# EAGLE board sparkfun-atsamd21g-breakout-ProtoPanel_v01 (EAGLE 7.3.0), part 1 of 6
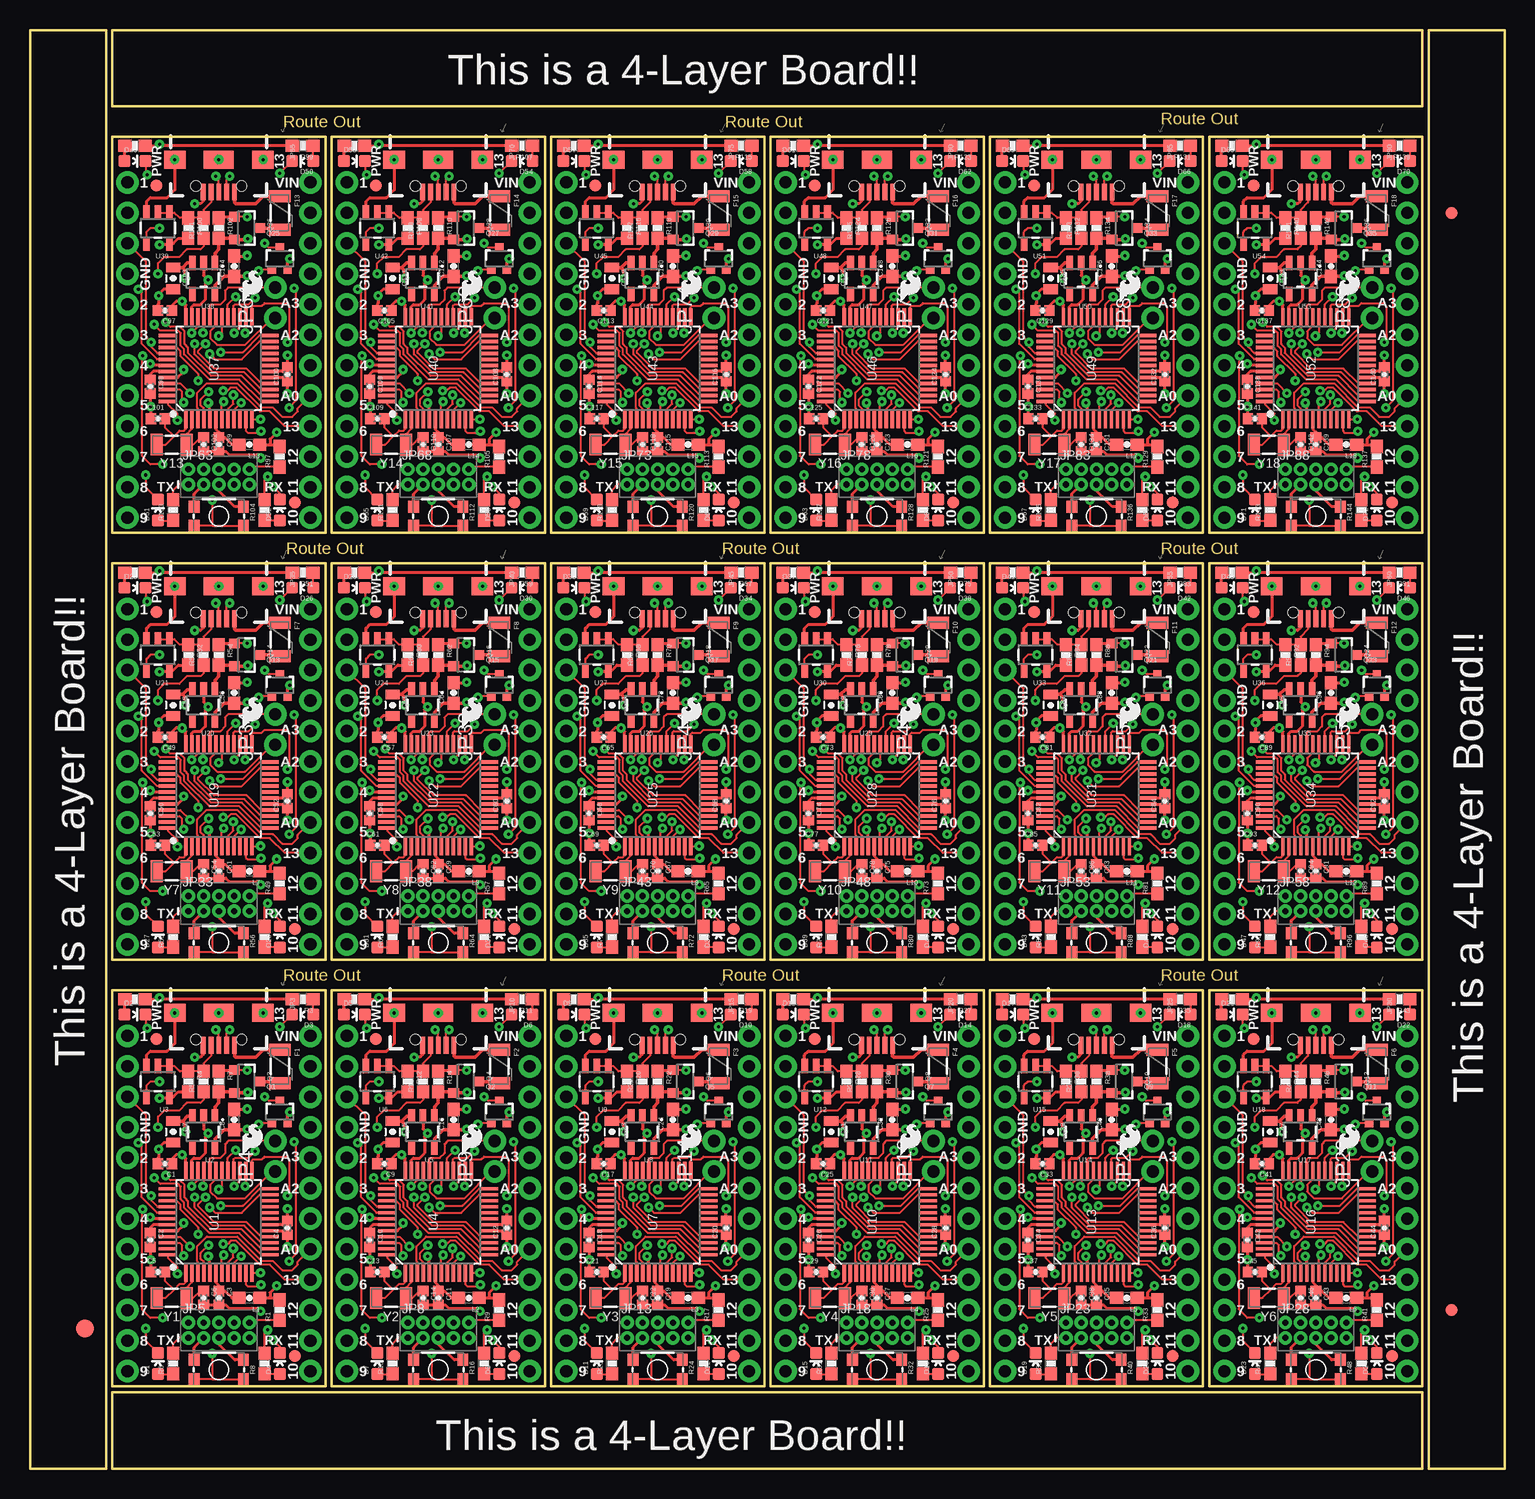
[diagram p0: board, top side]
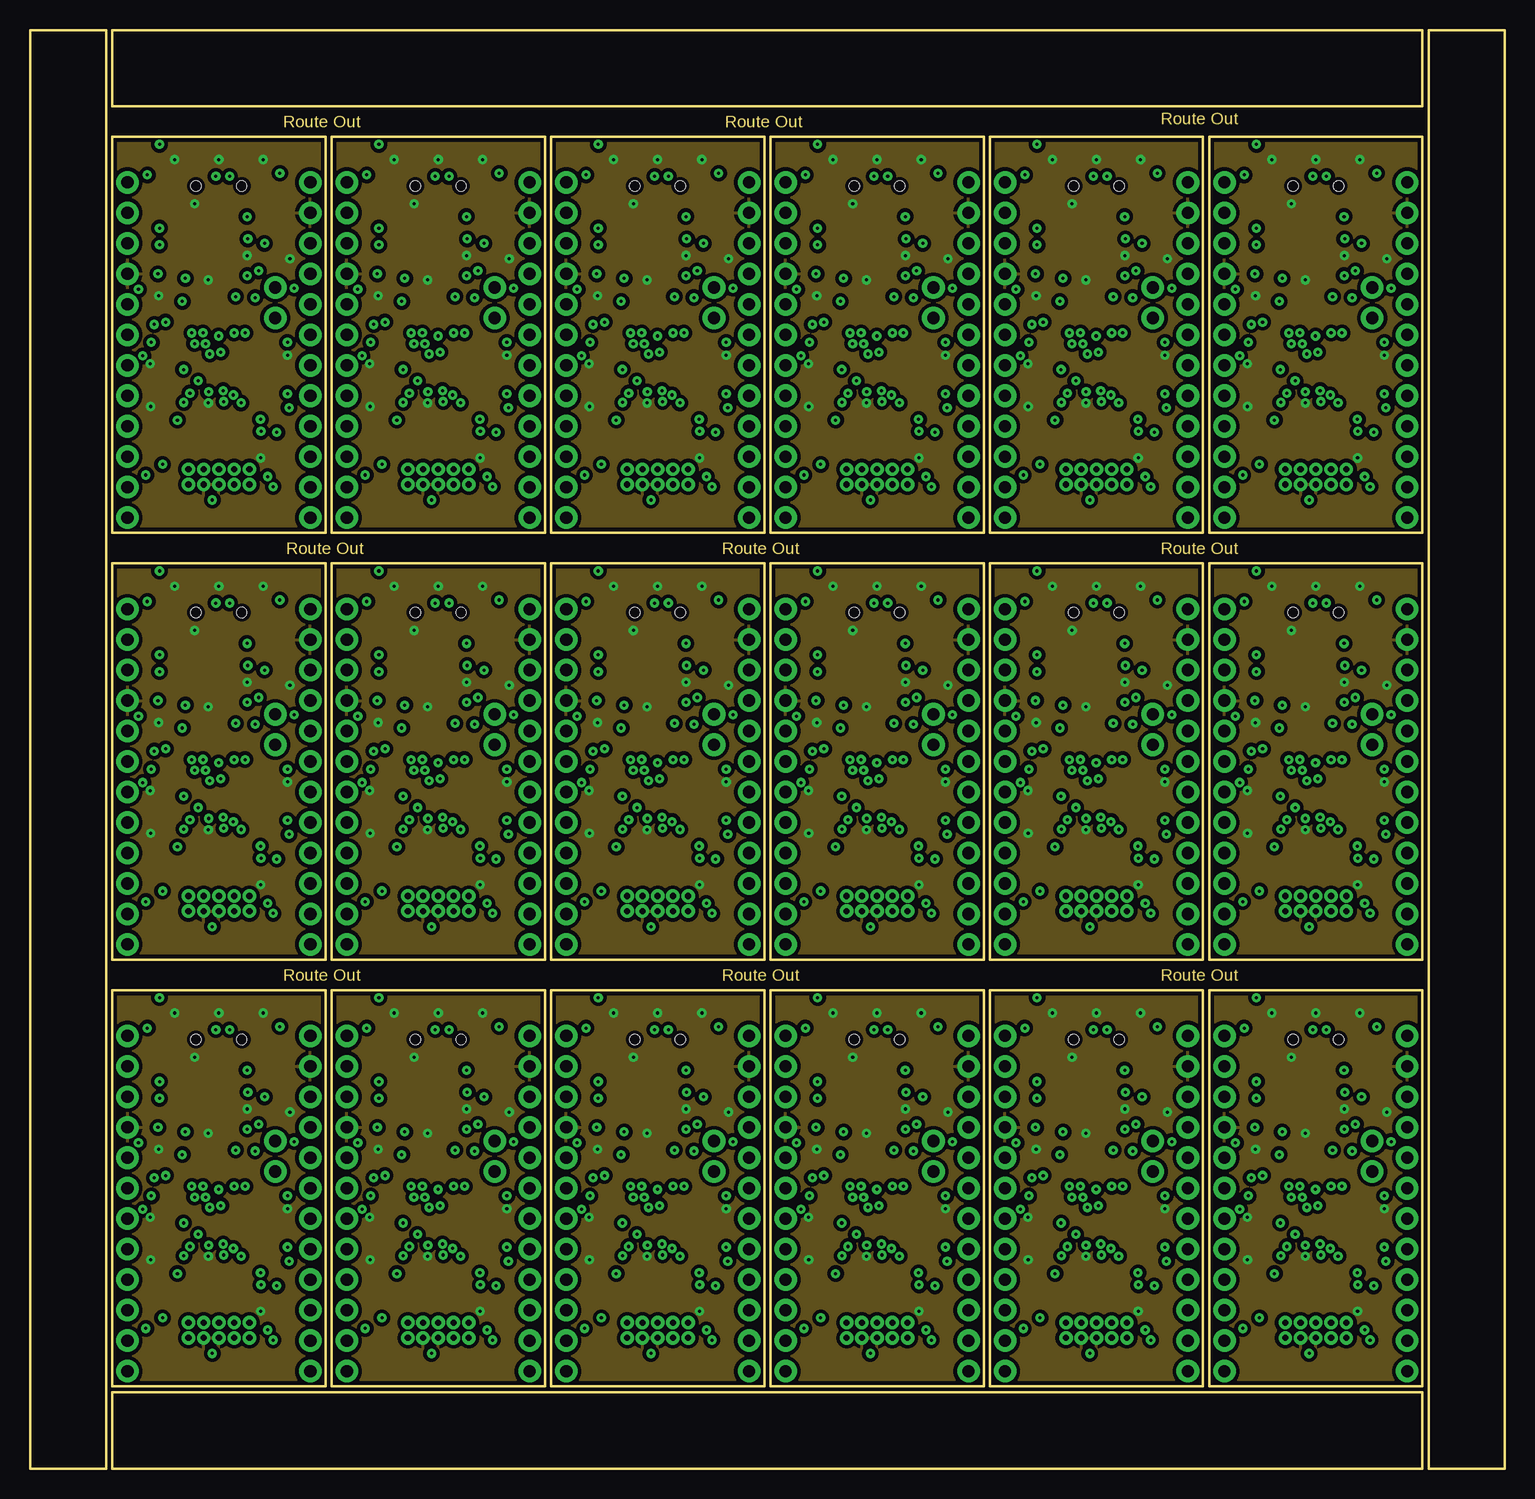
[diagram p1: board, inner layer Route2]
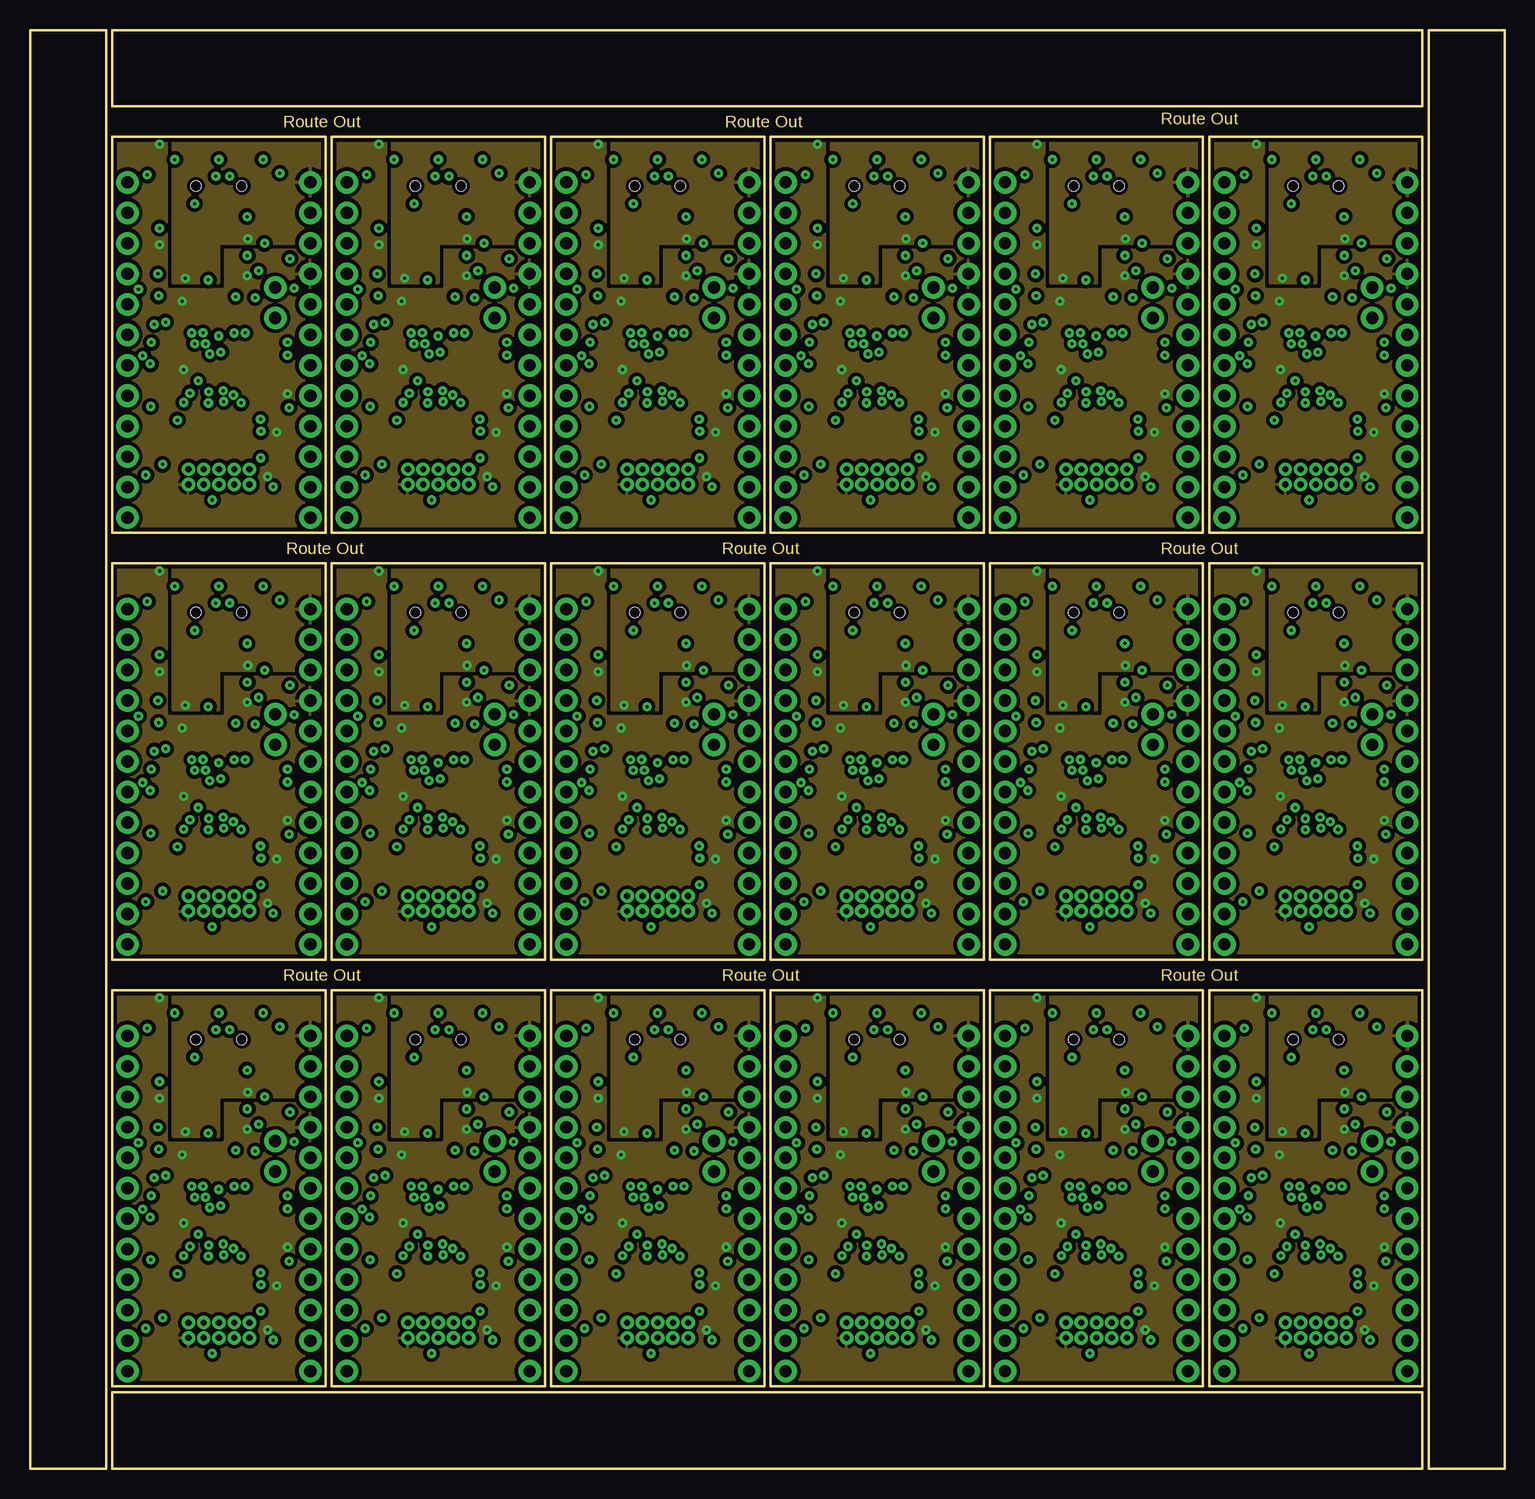
[diagram p2: board, inner layer Route15]
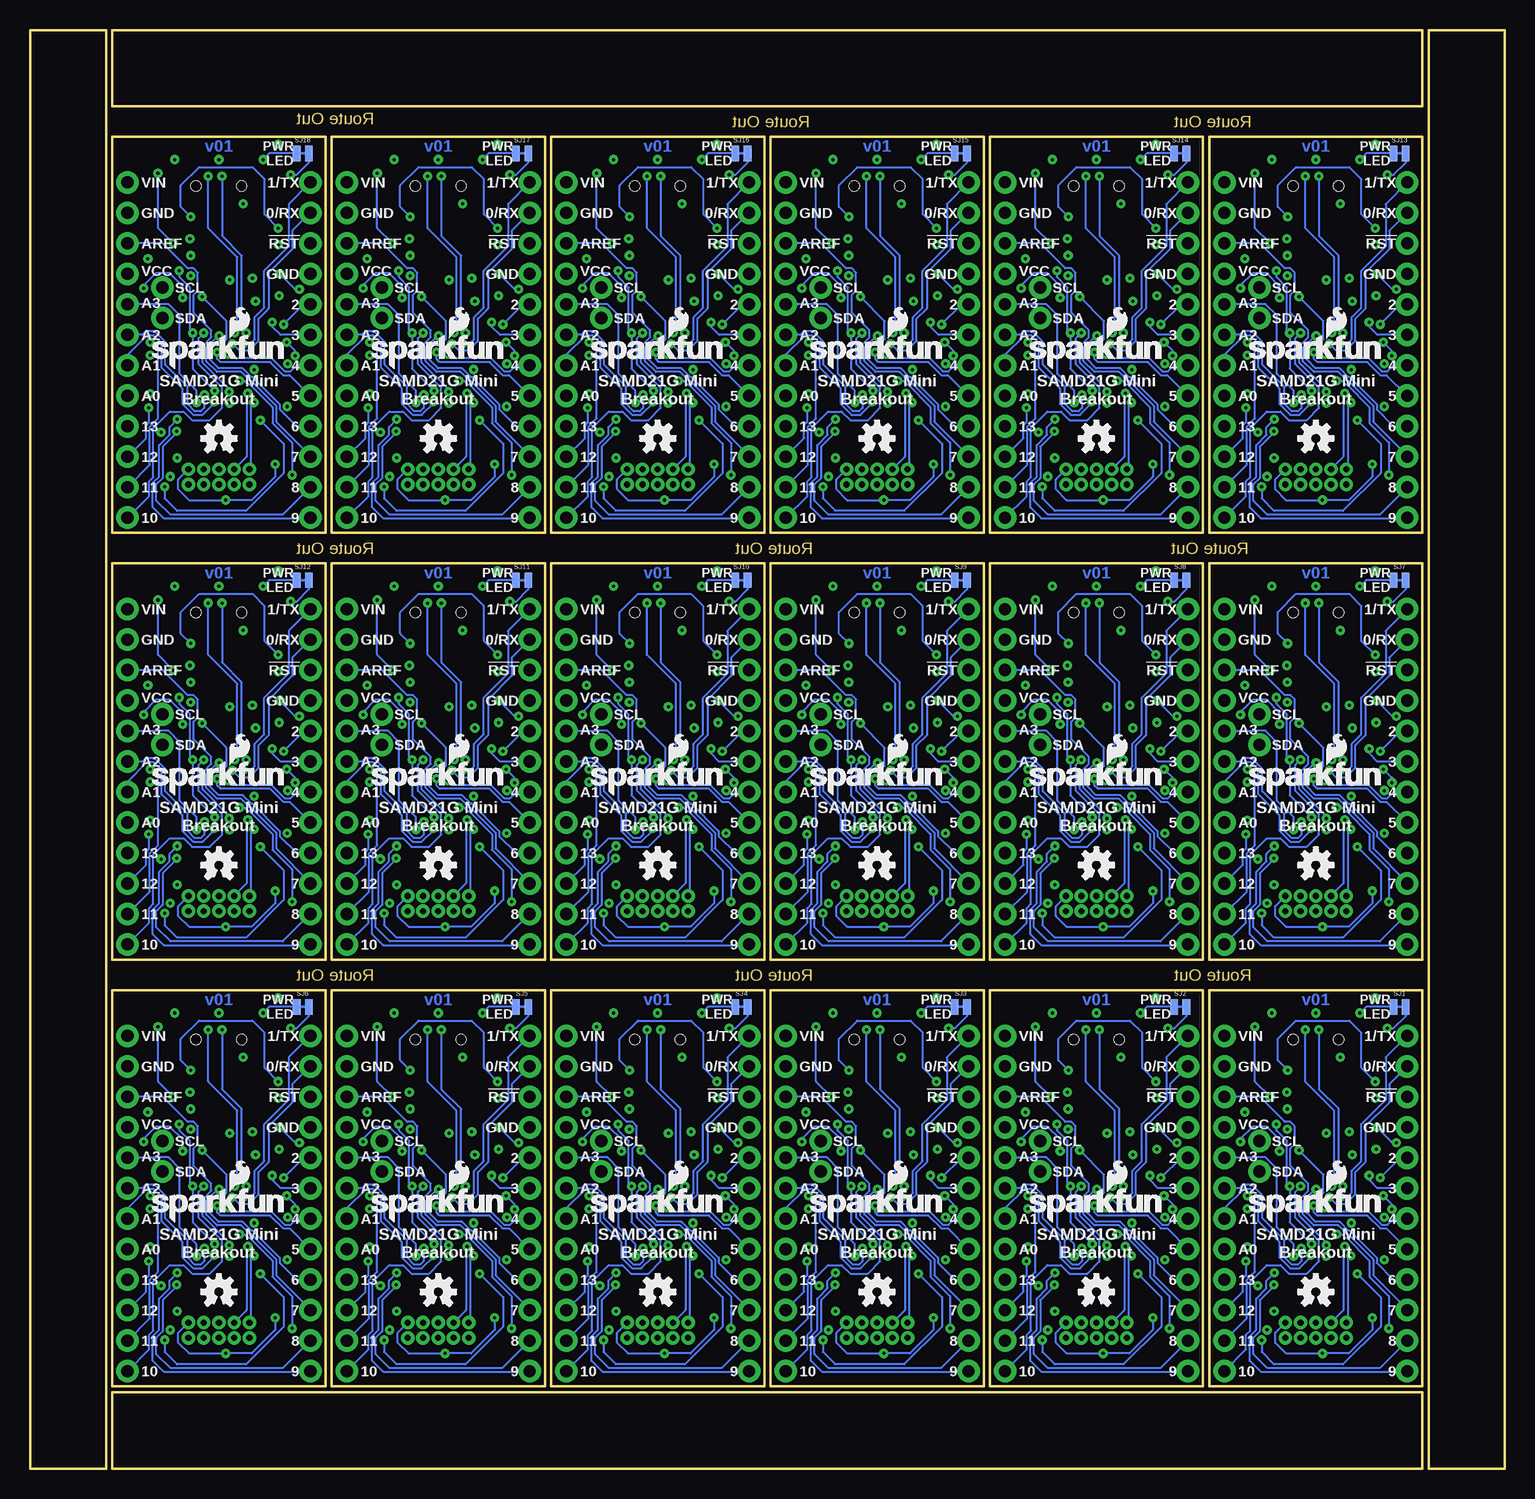
[diagram p3: board, bottom side, seen from below]

Size 122.94 x 119.89 mm. Coordinates in mm from the lower left corner, seen from the top.
Outline: 6.86,6.86 6.86,39.88 24.64,39.88 24.64,6.86 6.86,6.86
Outline: 25.15,6.86 25.15,39.88 42.93,39.88 42.93,6.86 25.15,6.86
Outline: 43.43,6.86 43.43,39.88 61.21,39.88 61.21,6.86 43.43,6.86
Outline: 61.72,6.86 61.72,39.88 79.5,39.88 79.5,6.86 61.72,6.86
Outline: 80.01,6.86 80.01,39.88 97.79,39.88 97.79,6.86 80.01,6.86
Outline: 98.3,6.86 98.3,39.88 116.08,39.88 116.08,6.86 98.3,6.86
Outline: 6.86,42.42 6.86,75.44 24.64,75.44 24.64,42.42 6.86,42.42
Outline: 25.15,42.42 25.15,75.44 42.93,75.44 42.93,42.42 25.15,42.42
Outline: 43.43,42.42 43.43,75.44 61.21,75.44 61.21,42.42 43.43,42.42
Outline: 61.72,42.42 61.72,75.44 79.5,75.44 79.5,42.42 61.72,42.42
Outline: 80.01,42.42 80.01,75.44 97.79,75.44 97.79,42.42 80.01,42.42
Outline: 98.3,42.42 98.3,75.44 116.08,75.44 116.08,42.42 98.3,42.42
Outline: 6.86,77.98 6.86,111 24.64,111 24.64,77.98 6.86,77.98
Outline: 25.15,77.98 25.15,111 42.93,111 42.93,77.98 25.15,77.98
Outline: 43.43,77.98 43.43,111 61.21,111 61.21,77.98 43.43,77.98
Outline: 61.72,77.98 61.72,111 79.5,111 79.5,77.98 61.72,77.98
Outline: 80.01,77.98 80.01,111 97.79,111 97.79,77.98 80.01,77.98
Outline: 98.3,77.98 98.3,111 116.08,111 116.08,77.98 98.3,77.98
Outline: 6.86,113.54 116.08,113.54 116.08,119.89 6.86,119.89 6.86,113.54
Outline: 116.59,119.89 116.59,0 122.94,0 122.94,119.89 116.59,119.89
Outline: 116.08,6.35 6.86,6.35 6.86,0 116.08,0 116.08,6.35
Outline: 6.35,0 6.35,119.89 0,119.89 0,0 6.35,0
Copper layers (1*2*15*16): Top 0.035mm / dielectric 1.5mm / Route2 0.035mm / dielectric 0.15mm / Route15 0.035mm / dielectric 0.2mm / Bottom 0.035mm
Design rules "SparkFun-4-layer *": minimum track width 6mil, minimum drill 10mil, track to track 6mil, track to pad 6mil, pad to pad 6mil, via to via 6mil, smd to smd 6mil, copper to edge 6mil, drill to drill 8mil, minimum pad ring 12mil, minimum via ring 10mil, stop-mask expansion 4mil, vias tented up to drill 20mil, thermal gap 12mil

## Footprints (pad centres in the part's own frame; a part is rotated, then mirrored left to right if it is on the bottom)
0402-CAP = smd 0.85 x 0.9: 1 -0.58,0; 2 0.58,0
0805-CAP = smd 0.8 x 1.2: 1 -0.9,0; 2 0.9,0
0603-CAP = smd 1.1 x 1: 1 -0.85,0; 2 0.85,0
LED-0603 = smd 1 x 1: A 0,-0.877; C 0,0.877
FIDUCIAL-1.5X3 = smd 1.5 x 1.5: 1 0,0
FIDUCIAL-1X2 = smd 1 x 1: 1 0,0
PTC-1206 = smd 1 x 1.8: 1 -1.4,0; 2 1.4,0
1X12_NO_SILK = drill 1.016 pad 1.88: 1 0,0; 2 2.54,0; 3 5.08,0; 4 7.62,0; 5 10.16,0; 6 12.7,0; 7 15.24,0; 8 17.78,0; 9 20.32,0; 10 22.86,0; 11 25.4,0; 12 27.94,0
USB-AB-MICRO-SMD_V03 = smd 1.4 x 0.4: D+1 2.7,0; D-1 2.7,0.65; GND1 2.7,-1.3; ID1 2.7,-0.65; VBUS1 2.7,1.3 | smd 1.5 x 1.8: SHIELD1 0,3.68; SHIELD3 0,-3.68 | smd 1.5 x 2.5: SHIELD2 0,0 | hole 0.85: 2.2,1.9; 2.2,-1.9
1X02_NO_SILK = drill 1.016 pad 1.88: 1 0,0; 2 2.54,0
2X5-PTH-1.27MM = drill 0.508 pad 1: 1 -2.54,-0.635; 2 -2.54,0.635; 3 -1.27,-0.635; 4 -1.27,0.635; 5 0,-0.635; 6 0,0.635; 7 1.27,-0.635; 8 1.27,0.635; 9 2.54,-0.635; 10 2.54,0.635
0603 = smd 1.1 x 1: 1 -0.85,0; 2 0.85,0
SOT323 = smd 0.7 x 0.7: 1 -0.65,-0.925; 2 0.65,-0.925; 3 0,0.925
SOT23-3 = smd 0.8 x 0.9: 1 -0.95,-1; 2 0.95,-1; 3 0,1.1
0603-RES = smd 1.1 x 1: 1 -0.85,0; 2 0.85,0
TACTILE_SWITCH_SMD_4.6X2.8MM = smd 0.9 x 1: 1 -2.05,-0.8; 2 2.05,-0.8; 3 2.05,0.8; 4 -2.05,0.8
PAD-JUMPER-2-NC_BY_TRACE_NO_SILK = smd 0.635 x 1.27: 1 -0.508,0; 2 0.508,0
TQFP-48 = smd 1.5 x 0.28: 1 -4.25,2.75; 2 -4.25,2.25; 3 -4.25,1.75; 4 -4.25,1.25; 5 -4.25,0.75; 6 -4.25,0.25; 7 -4.25,-0.25; 8 -4.25,-0.75; 9 -4.25,-1.25; 10 -4.25,-1.75; 11 -4.25,-2.25; 12 -4.25,-2.75; 25 4.25,-2.75; 26 4.25,-2.25; 27 4.25,-1.75; 28 4.25,-1.25; 29 4.25,-0.75; 30 4.25,-0.25; 31 4.25,0.25; 32 4.25,0.75; 33 4.25,1.25; 34 4.25,1.75; 35 4.25,2.25; 36 4.25,2.75 | smd 0.28 x 1.5: 13 -2.75,-4.25; 14 -2.25,-4.25; 15 -1.75,-4.25; 16 -1.25,-4.25; 17 -0.75,-4.25; 18 -0.25,-4.25; 19 0.25,-4.25; 20 0.75,-4.25; 21 1.25,-4.25; 22 1.75,-4.25; 23 2.25,-4.25; 24 2.75,-4.25; 37 2.75,4.25; 38 2.25,4.25; 39 1.75,4.25; 40 1.25,4.25; 41 0.75,4.25; 42 0.25,4.25; 43 -0.25,4.25; 44 -0.75,4.25; 45 -1.25,4.25; 46 -1.75,4.25; 47 -2.25,4.25; 48 -2.75,4.25
SOT23-5 = smd 0.55 x 1.2: 1 -0.95,-1.3; 2 0,-1.3; 3 0.95,-1.3; 4 0.95,1.3; 5 -0.95,1.3
CRYSTAL-SMD-3.2X1.5MM = smd 1 x 1.8: P$1 -1.25,0; P$2 1.25,0

## Placement (x,y rotation side)
C1  0.1uF  [0402-CAP]  11.25,25.4 180 top
C2  0.1uF  [0402-CAP]  10.03,19.05 270 top
C3  0.1uF  [0402-CAP]  15.75,14.22 270 top
C4  0.1uF  [0402-CAP]  21.46,20.07 90 top
C5  15pF  [0402-CAP]  10.67,16.38 0 top
C6  15pF  [0402-CAP]  14.48,14.22 270 top
C7  1.0uF  [0805-CAP]  11.94,28.07 270 top
C8  2.2uF  [0603-CAP]  17.02,29.08 90 top
C9  0.1uF  [0402-CAP]  29.54,25.4 180 top
C10  0.1uF  [0402-CAP]  28.32,19.05 270 top
C11  0.1uF  [0402-CAP]  34.04,14.22 270 top
C12  0.1uF  [0402-CAP]  39.75,20.07 90 top
C13  15pF  [0402-CAP]  28.96,16.38 0 top
C14  15pF  [0402-CAP]  32.77,14.22 270 top
C15  1.0uF  [0805-CAP]  30.23,28.07 270 top
C16  2.2uF  [0603-CAP]  35.31,29.08 90 top
C17  0.1uF  [0402-CAP]  47.83,25.4 180 top
C18  0.1uF  [0402-CAP]  46.61,19.05 270 top
C19  0.1uF  [0402-CAP]  52.32,14.22 270 top
C20  0.1uF  [0402-CAP]  58.04,20.07 90 top
C21  15pF  [0402-CAP]  47.24,16.38 0 top
C22  15pF  [0402-CAP]  51.05,14.22 270 top
C23  1.0uF  [0805-CAP]  48.51,28.07 270 top
C24  2.2uF  [0603-CAP]  53.59,29.08 90 top
C25  0.1uF  [0402-CAP]  66.12,25.4 180 top
C26  0.1uF  [0402-CAP]  64.9,19.05 270 top
C27  0.1uF  [0402-CAP]  70.61,14.22 270 top
C28  0.1uF  [0402-CAP]  76.33,20.07 90 top
C29  15pF  [0402-CAP]  65.53,16.38 0 top
C30  15pF  [0402-CAP]  69.34,14.22 270 top
C31  1.0uF  [0805-CAP]  66.8,28.07 270 top
C32  2.2uF  [0603-CAP]  71.88,29.08 90 top
C33  0.1uF  [0402-CAP]  84.4,25.4 180 top
C34  0.1uF  [0402-CAP]  83.19,19.05 270 top
C35  0.1uF  [0402-CAP]  88.9,14.22 270 top
C36  0.1uF  [0402-CAP]  94.61,20.07 90 top
C37  15pF  [0402-CAP]  83.82,16.38 0 top
C38  15pF  [0402-CAP]  87.63,14.22 270 top
C39  1.0uF  [0805-CAP]  85.09,28.07 270 top
C40  2.2uF  [0603-CAP]  90.17,29.08 90 top
C41  0.1uF  [0402-CAP]  102.69,25.4 180 top
C42  0.1uF  [0402-CAP]  101.47,19.05 270 top
C43  0.1uF  [0402-CAP]  107.19,14.22 270 top
C44  0.1uF  [0402-CAP]  112.9,20.07 90 top
C45  15pF  [0402-CAP]  102.11,16.38 0 top
C46  15pF  [0402-CAP]  105.92,14.22 270 top
C47  1.0uF  [0805-CAP]  103.38,28.07 270 top
C48  2.2uF  [0603-CAP]  108.46,29.08 90 top
C49  0.1uF  [0402-CAP]  11.25,60.96 180 top
C50  0.1uF  [0402-CAP]  10.03,54.61 270 top
C51  0.1uF  [0402-CAP]  15.75,49.78 270 top
C52  0.1uF  [0402-CAP]  21.46,55.63 90 top
C53  15pF  [0402-CAP]  10.67,51.94 0 top
C54  15pF  [0402-CAP]  14.48,49.78 270 top
C55  1.0uF  [0805-CAP]  11.94,63.63 270 top
C56  2.2uF  [0603-CAP]  17.02,64.64 90 top
C57  0.1uF  [0402-CAP]  29.54,60.96 180 top
C58  0.1uF  [0402-CAP]  28.32,54.61 270 top
C59  0.1uF  [0402-CAP]  34.04,49.78 270 top
C60  0.1uF  [0402-CAP]  39.75,55.63 90 top
C61  15pF  [0402-CAP]  28.96,51.94 0 top
C62  15pF  [0402-CAP]  32.77,49.78 270 top
C63  1.0uF  [0805-CAP]  30.23,63.63 270 top
C64  2.2uF  [0603-CAP]  35.31,64.64 90 top
C65  0.1uF  [0402-CAP]  47.83,60.96 180 top
C66  0.1uF  [0402-CAP]  46.61,54.61 270 top
C67  0.1uF  [0402-CAP]  52.32,49.78 270 top
C68  0.1uF  [0402-CAP]  58.04,55.63 90 top
C69  15pF  [0402-CAP]  47.24,51.94 0 top
C70  15pF  [0402-CAP]  51.05,49.78 270 top
C71  1.0uF  [0805-CAP]  48.51,63.63 270 top
C72  2.2uF  [0603-CAP]  53.59,64.64 90 top
C73  0.1uF  [0402-CAP]  66.12,60.96 180 top
C74  0.1uF  [0402-CAP]  64.9,54.61 270 top
C75  0.1uF  [0402-CAP]  70.61,49.78 270 top
C76  0.1uF  [0402-CAP]  76.33,55.63 90 top
C77  15pF  [0402-CAP]  65.53,51.94 0 top
C78  15pF  [0402-CAP]  69.34,49.78 270 top
C79  1.0uF  [0805-CAP]  66.8,63.63 270 top
C80  2.2uF  [0603-CAP]  71.88,64.64 90 top
C81  0.1uF  [0402-CAP]  84.4,60.96 180 top
C82  0.1uF  [0402-CAP]  83.19,54.61 270 top
C83  0.1uF  [0402-CAP]  88.9,49.78 270 top
C84  0.1uF  [0402-CAP]  94.61,55.63 90 top
C85  15pF  [0402-CAP]  83.82,51.94 0 top
C86  15pF  [0402-CAP]  87.63,49.78 270 top
C87  1.0uF  [0805-CAP]  85.09,63.63 270 top
C88  2.2uF  [0603-CAP]  90.17,64.64 90 top
C89  0.1uF  [0402-CAP]  102.69,60.96 180 top
C90  0.1uF  [0402-CAP]  101.47,54.61 270 top
C91  0.1uF  [0402-CAP]  107.19,49.78 270 top
C92  0.1uF  [0402-CAP]  112.9,55.63 90 top
C93  15pF  [0402-CAP]  102.11,51.94 0 top
C94  15pF  [0402-CAP]  105.92,49.78 270 top
C95  1.0uF  [0805-CAP]  103.38,63.63 270 top
C96  2.2uF  [0603-CAP]  108.46,64.64 90 top
C97  0.1uF  [0402-CAP]  11.25,96.52 180 top
C98  0.1uF  [0402-CAP]  10.03,90.17 270 top
C99  0.1uF  [0402-CAP]  15.75,85.34 270 top
C100  0.1uF  [0402-CAP]  21.46,91.19 90 top
C101  15pF  [0402-CAP]  10.67,87.5 0 top
C102  15pF  [0402-CAP]  14.48,85.34 270 top
C103  1.0uF  [0805-CAP]  11.94,99.19 270 top
C104  2.2uF  [0603-CAP]  17.02,100.2 90 top
C105  0.1uF  [0402-CAP]  29.54,96.52 180 top
C106  0.1uF  [0402-CAP]  28.32,90.17 270 top
C107  0.1uF  [0402-CAP]  34.04,85.34 270 top
C108  0.1uF  [0402-CAP]  39.75,91.19 90 top
C109  15pF  [0402-CAP]  28.96,87.5 0 top
C110  15pF  [0402-CAP]  32.77,85.34 270 top
C111  1.0uF  [0805-CAP]  30.23,99.19 270 top
C112  2.2uF  [0603-CAP]  35.31,100.2 90 top
C113  0.1uF  [0402-CAP]  47.83,96.52 180 top
C114  0.1uF  [0402-CAP]  46.61,90.17 270 top
C115  0.1uF  [0402-CAP]  52.32,85.34 270 top
C116  0.1uF  [0402-CAP]  58.04,91.19 90 top
C117  15pF  [0402-CAP]  47.24,87.5 0 top
C118  15pF  [0402-CAP]  51.05,85.34 270 top
C119  1.0uF  [0805-CAP]  48.51,99.19 270 top
C120  2.2uF  [0603-CAP]  53.59,100.2 90 top
C121  0.1uF  [0402-CAP]  66.12,96.52 180 top
C122  0.1uF  [0402-CAP]  64.9,90.17 270 top
C123  0.1uF  [0402-CAP]  70.61,85.34 270 top
C124  0.1uF  [0402-CAP]  76.33,91.19 90 top
C125  15pF  [0402-CAP]  65.53,87.5 0 top
C126  15pF  [0402-CAP]  69.34,85.34 270 top
C127  1.0uF  [0805-CAP]  66.8,99.19 270 top
C128  2.2uF  [0603-CAP]  71.88,100.2 90 top
C129  0.1uF  [0402-CAP]  84.4,96.52 180 top
C130  0.1uF  [0402-CAP]  83.19,90.17 270 top
C131  0.1uF  [0402-CAP]  88.9,85.34 270 top
C132  0.1uF  [0402-CAP]  94.61,91.19 90 top
C133  15pF  [0402-CAP]  83.82,87.5 0 top
C134  15pF  [0402-CAP]  87.63,85.34 270 top
C135  1.0uF  [0805-CAP]  85.09,99.19 270 top
C136  2.2uF  [0603-CAP]  90.17,100.2 90 top
C137  0.1uF  [0402-CAP]  102.69,96.52 180 top
C138  0.1uF  [0402-CAP]  101.47,90.17 270 top
C139  0.1uF  [0402-CAP]  107.19,85.34 270 top
C140  0.1uF  [0402-CAP]  112.9,91.19 90 top
C141  15pF  [0402-CAP]  102.11,87.5 0 top
C142  15pF  [0402-CAP]  105.92,85.34 270 top
C143  1.0uF  [0805-CAP]  103.38,99.19 270 top
C144  2.2uF  [0603-CAP]  108.46,100.2 90 top
D1  GREEN  [LED-0603]  10.67,8.76 0 top
D2  RED  [LED-0603]  8.76,37.85 270 top
D3  BLUE  [LED-0603]  22.73,37.85 90 top
D4  Yellow  [LED-0603]  20.83,8.76 0 top
D5  RED  [LED-0603]  27.05,37.85 270 top
D6  BLUE  [LED-0603]  41.02,37.85 90 top
D7  GREEN  [LED-0603]  28.96,8.76 0 top
D8  Yellow  [LED-0603]  39.12,8.76 0 top
D9  RED  [LED-0603]  45.34,37.85 270 top
D10  BLUE  [LED-0603]  59.31,37.85 90 top
D11  GREEN  [LED-0603]  47.24,8.76 0 top
D12  Yellow  [LED-0603]  57.4,8.76 0 top
D13  RED  [LED-0603]  63.63,37.85 270 top
D14  BLUE  [LED-0603]  77.6,37.85 90 top
D15  GREEN  [LED-0603]  65.53,8.76 0 top
D16  Yellow  [LED-0603]  75.69,8.76 0 top
D17  RED  [LED-0603]  81.92,37.85 270 top
D18  BLUE  [LED-0603]  95.89,37.85 90 top
D19  GREEN  [LED-0603]  83.82,8.76 0 top
D20  Yellow  [LED-0603]  93.98,8.76 0 top
D21  RED  [LED-0603]  100.2,37.85 270 top
D22  BLUE  [LED-0603]  114.17,37.85 90 top
D23  GREEN  [LED-0603]  102.11,8.76 0 top
D24  Yellow  [LED-0603]  112.27,8.76 0 top
D25  RED  [LED-0603]  8.76,73.41 270 top
D26  BLUE  [LED-0603]  22.73,73.41 90 top
D27  GREEN  [LED-0603]  10.67,44.32 0 top
D28  Yellow  [LED-0603]  20.83,44.32 0 top
D29  RED  [LED-0603]  27.05,73.41 270 top
D30  BLUE  [LED-0603]  41.02,73.41 90 top
D31  GREEN  [LED-0603]  28.96,44.32 0 top
D32  Yellow  [LED-0603]  39.12,44.32 0 top
D33  RED  [LED-0603]  45.34,73.41 270 top
D34  BLUE  [LED-0603]  59.31,73.41 90 top
D35  GREEN  [LED-0603]  47.24,44.32 0 top
D36  Yellow  [LED-0603]  57.4,44.32 0 top
D37  RED  [LED-0603]  63.63,73.41 270 top
D38  BLUE  [LED-0603]  77.6,73.41 90 top
D39  GREEN  [LED-0603]  65.53,44.32 0 top
D40  Yellow  [LED-0603]  75.69,44.32 0 top
D41  RED  [LED-0603]  81.92,73.41 270 top
D42  BLUE  [LED-0603]  95.89,73.41 90 top
D43  GREEN  [LED-0603]  83.82,44.32 0 top
D44  Yellow  [LED-0603]  93.98,44.32 0 top
D45  RED  [LED-0603]  100.2,73.41 270 top
D46  BLUE  [LED-0603]  114.17,73.41 90 top
D47  GREEN  [LED-0603]  102.11,44.32 0 top
D48  Yellow  [LED-0603]  112.27,44.32 0 top
D49  RED  [LED-0603]  8.76,108.97 270 top
D50  BLUE  [LED-0603]  22.73,108.97 90 top
D51  GREEN  [LED-0603]  10.67,79.88 0 top
D52  Yellow  [LED-0603]  20.83,79.88 0 top
D53  RED  [LED-0603]  27.05,108.97 270 top
D54  BLUE  [LED-0603]  41.02,108.97 90 top
D55  GREEN  [LED-0603]  28.96,79.88 0 top
D56  Yellow  [LED-0603]  39.12,79.88 0 top
D57  RED  [LED-0603]  45.34,108.97 270 top
D58  BLUE  [LED-0603]  59.31,108.97 90 top
D59  GREEN  [LED-0603]  47.24,79.88 0 top
D60  Yellow  [LED-0603]  57.4,79.88 0 top
D61  RED  [LED-0603]  63.63,108.97 270 top
D62  BLUE  [LED-0603]  77.6,108.97 90 top
D63  GREEN  [LED-0603]  65.53,79.88 0 top
D64  Yellow  [LED-0603]  75.69,79.88 0 top
D65  RED  [LED-0603]  81.92,108.97 270 top
D66  BLUE  [LED-0603]  95.89,108.97 90 top
D67  GREEN  [LED-0603]  83.82,79.88 0 top
D68  Yellow  [LED-0603]  93.98,79.88 0 top
D69  RED  [LED-0603]  100.2,108.97 270 top
D70  BLUE  [LED-0603]  114.17,108.97 90 top
D71  GREEN  [LED-0603]  102.11,79.88 0 top
D72  Yellow  [LED-0603]  112.27,79.88 0 top
E$1  [FIDUCIAL-1.5X3]  4.57,11.68 0 top
E$3  [FIDUCIAL-1X2]  118.49,104.65 180 top
E$4  [FIDUCIAL-1X2]  118.49,13.21 0 top
F1  500mA  [PTC-1206]  20.83,33.53 270 top
F2  500mA  [PTC-1206]  39.12,33.53 270 top
F3  500mA  [PTC-1206]  57.4,33.53 270 top
F4  500mA  [PTC-1206]  75.69,33.53 270 top
F5  500mA  [PTC-1206]  93.98,33.53 270 top
F6  500mA  [PTC-1206]  112.27,33.53 270 top
F7  500mA  [PTC-1206]  20.83,69.09 270 top
F8  500mA  [PTC-1206]  39.12,69.09 270 top
F9  500mA  [PTC-1206]  57.4,69.09 270 top
F10  500mA  [PTC-1206]  75.69,69.09 270 top
F11  500mA  [PTC-1206]  93.98,69.09 270 top
F12  500mA  [PTC-1206]  112.27,69.09 270 top
F13  500mA  [PTC-1206]  20.83,104.65 270 top
F14  500mA  [PTC-1206]  39.12,104.65 270 top
F15  500mA  [PTC-1206]  57.4,104.65 270 top
F16  500mA  [PTC-1206]  75.69,104.65 270 top
F17  500mA  [PTC-1206]  93.98,104.65 270 top
F18  500mA  [PTC-1206]  112.27,104.65 270 top
FID1  FIDUCIAL1X2  [FIDUCIAL-1X2]  22.1,9.4 0 top
FID2  FIDUCIAL1X2  [FIDUCIAL-1X2]  10.54,35.81 0 top
FID3  FIDUCIAL1X2  [FIDUCIAL-1X2]  40.39,9.4 0 top
FID4  FIDUCIAL1X2  [FIDUCIAL-1X2]  28.83,35.81 0 top
FID5  FIDUCIAL1X2  [FIDUCIAL-1X2]  58.67,9.4 0 top
FID6  FIDUCIAL1X2  [FIDUCIAL-1X2]  47.12,35.81 0 top
FID7  FIDUCIAL1X2  [FIDUCIAL-1X2]  76.96,9.4 0 top
FID8  FIDUCIAL1X2  [FIDUCIAL-1X2]  65.41,35.81 0 top
FID9  FIDUCIAL1X2  [FIDUCIAL-1X2]  95.25,9.4 0 top
FID10  FIDUCIAL1X2  [FIDUCIAL-1X2]  83.69,35.81 0 top
FID11  FIDUCIAL1X2  [FIDUCIAL-1X2]  113.54,9.4 0 top
FID12  FIDUCIAL1X2  [FIDUCIAL-1X2]  101.98,35.81 0 top
FID13  FIDUCIAL1X2  [FIDUCIAL-1X2]  22.1,44.96 0 top
FID14  FIDUCIAL1X2  [FIDUCIAL-1X2]  10.54,71.37 0 top
FID15  FIDUCIAL1X2  [FIDUCIAL-1X2]  40.39,44.96 0 top
FID16  FIDUCIAL1X2  [FIDUCIAL-1X2]  28.83,71.37 0 top
FID17  FIDUCIAL1X2  [FIDUCIAL-1X2]  58.67,44.96 0 top
FID18  FIDUCIAL1X2  [FIDUCIAL-1X2]  47.12,71.37 0 top
FID19  FIDUCIAL1X2  [FIDUCIAL-1X2]  76.96,44.96 0 top
FID20  FIDUCIAL1X2  [FIDUCIAL-1X2]  65.41,71.37 0 top
FID21  FIDUCIAL1X2  [FIDUCIAL-1X2]  95.25,44.96 0 top
FID22  FIDUCIAL1X2  [FIDUCIAL-1X2]  83.69,71.37 0 top
FID23  FIDUCIAL1X2  [FIDUCIAL-1X2]  113.54,44.96 0 top
FID24  FIDUCIAL1X2  [FIDUCIAL-1X2]  101.98,71.37 0 top
FID25  FIDUCIAL1X2  [FIDUCIAL-1X2]  22.1,80.52 0 top
FID26  FIDUCIAL1X2  [FIDUCIAL-1X2]  10.54,106.93 0 top
FID27  FIDUCIAL1X2  [FIDUCIAL-1X2]  40.39,80.52 0 top
FID28  FIDUCIAL1X2  [FIDUCIAL-1X2]  28.83,106.93 0 top
FID29  FIDUCIAL1X2  [FIDUCIAL-1X2]  58.67,80.52 0 top
FID30  FIDUCIAL1X2  [FIDUCIAL-1X2]  47.12,106.93 0 top
FID31  FIDUCIAL1X2  [FIDUCIAL-1X2]  76.96,80.52 0 top
FID32  FIDUCIAL1X2  [FIDUCIAL-1X2]  65.41,106.93 0 top
FID33  FIDUCIAL1X2  [FIDUCIAL-1X2]  95.25,80.52 0 top
FID34  FIDUCIAL1X2  [FIDUCIAL-1X2]  83.69,106.93 0 top
FID35  FIDUCIAL1X2  [FIDUCIAL-1X2]  113.54,80.52 0 top
FID36  FIDUCIAL1X2  [FIDUCIAL-1X2]  101.98,106.93 0 top
JP1  [1X12_NO_SILK]  8.13,8.13 90 top
JP2  [1X12_NO_SILK]  23.37,36.07 270 top
JP3  [USB-AB-MICRO-SMD_V03]  15.75,37.97 270 top
JP4  [1X02_NO_SILK]  20.45,24.77 90 top
JP5  CORTEX_DEBUGPTH  [2X5-PTH-1.27MM]  15.75,11.53 0 top
JP6  [1X12_NO_SILK]  26.42,8.13 90 top
JP7  [1X12_NO_SILK]  41.66,36.07 270 top
JP8  CORTEX_DEBUGPTH  [2X5-PTH-1.27MM]  34.04,11.53 0 top
JP9  [1X02_NO_SILK]  38.73,24.77 90 top
JP10  [USB-AB-MICRO-SMD_V03]  34.04,37.97 270 top
JP11  [1X12_NO_SILK]  44.7,8.13 90 top
JP12  [1X12_NO_SILK]  59.94,36.07 270 top
JP13  CORTEX_DEBUGPTH  [2X5-PTH-1.27MM]  52.32,11.53 0 top
JP14  [1X02_NO_SILK]  57.02,24.77 90 top
JP15  [USB-AB-MICRO-SMD_V03]  52.32,37.97 270 top
JP16  [1X12_NO_SILK]  62.99,8.13 90 top
JP17  [1X12_NO_SILK]  78.23,36.07 270 top
JP18  CORTEX_DEBUGPTH  [2X5-PTH-1.27MM]  70.61,11.53 0 top
JP19  [1X02_NO_SILK]  75.31,24.77 90 top
JP20  [USB-AB-MICRO-SMD_V03]  70.61,37.97 270 top
JP21  [1X12_NO_SILK]  81.28,8.13 90 top
JP22  [1X12_NO_SILK]  96.52,36.07 270 top
JP23  CORTEX_DEBUGPTH  [2X5-PTH-1.27MM]  88.9,11.53 0 top
JP24  [1X02_NO_SILK]  93.6,24.77 90 top
JP25  [USB-AB-MICRO-SMD_V03]  88.9,37.97 270 top
JP26  [1X12_NO_SILK]  99.57,8.13 90 top
JP27  [1X12_NO_SILK]  114.81,36.07 270 top
JP28  CORTEX_DEBUGPTH  [2X5-PTH-1.27MM]  107.19,11.53 0 top
JP29  [1X02_NO_SILK]  111.89,24.77 90 top
JP30  [USB-AB-MICRO-SMD_V03]  107.19,37.97 270 top
JP31  [1X12_NO_SILK]  8.13,43.69 90 top
JP32  [1X12_NO_SILK]  23.37,71.63 270 top
JP33  CORTEX_DEBUGPTH  [2X5-PTH-1.27MM]  15.75,47.09 0 top
JP34  [1X02_NO_SILK]  20.45,60.33 90 top
JP35  [USB-AB-MICRO-SMD_V03]  15.75,73.53 270 top
JP36  [1X12_NO_SILK]  26.42,43.69 90 top
JP37  [1X12_NO_SILK]  41.66,71.63 270 top
JP38  CORTEX_DEBUGPTH  [2X5-PTH-1.27MM]  34.04,47.09 0 top
JP39  [1X02_NO_SILK]  38.73,60.33 90 top
JP40  [USB-AB-MICRO-SMD_V03]  34.04,73.53 270 top
JP41  [1X12_NO_SILK]  44.7,43.69 90 top
JP42  [1X12_NO_SILK]  59.94,71.63 270 top
JP43  CORTEX_DEBUGPTH  [2X5-PTH-1.27MM]  52.32,47.09 0 top
JP44  [1X02_NO_SILK]  57.02,60.33 90 top
JP45  [USB-AB-MICRO-SMD_V03]  52.32,73.53 270 top
JP46  [1X12_NO_SILK]  62.99,43.69 90 top
JP47  [1X12_NO_SILK]  78.23,71.63 270 top
JP48  CORTEX_DEBUGPTH  [2X5-PTH-1.27MM]  70.61,47.09 0 top
JP49  [1X02_NO_SILK]  75.31,60.33 90 top
JP50  [USB-AB-MICRO-SMD_V03]  70.61,73.53 270 top
JP51  [1X12_NO_SILK]  81.28,43.69 90 top
JP52  [1X12_NO_SILK]  96.52,71.63 270 top
JP53  CORTEX_DEBUGPTH  [2X5-PTH-1.27MM]  88.9,47.09 0 top
JP54  [1X02_NO_SILK]  93.6,60.33 90 top
JP55  [USB-AB-MICRO-SMD_V03]  88.9,73.53 270 top
JP56  [1X12_NO_SILK]  99.57,43.69 90 top
JP57  [1X12_NO_SILK]  114.81,71.63 270 top
JP58  CORTEX_DEBUGPTH  [2X5-PTH-1.27MM]  107.19,47.09 0 top
JP59  [1X02_NO_SILK]  111.89,60.33 90 top
JP60  [USB-AB-MICRO-SMD_V03]  107.19,73.53 270 top
JP61  [1X12_NO_SILK]  8.13,79.25 90 top
JP62  [1X12_NO_SILK]  23.37,107.19 270 top
JP63  CORTEX_DEBUGPTH  [2X5-PTH-1.27MM]  15.75,82.65 0 top
JP64  [1X02_NO_SILK]  20.45,95.89 90 top
JP65  [USB-AB-MICRO-SMD_V03]  15.75,109.09 270 top
JP66  [1X12_NO_SILK]  26.42,79.25 90 top
JP67  [1X12_NO_SILK]  41.66,107.19 270 top
JP68  CORTEX_DEBUGPTH  [2X5-PTH-1.27MM]  34.04,82.65 0 top
JP69  [1X02_NO_SILK]  38.73,95.89 90 top
JP70  [USB-AB-MICRO-SMD_V03]  34.04,109.09 270 top
JP71  [1X12_NO_SILK]  44.7,79.25 90 top
JP72  [1X12_NO_SILK]  59.94,107.19 270 top
JP73  CORTEX_DEBUGPTH  [2X5-PTH-1.27MM]  52.32,82.65 0 top
JP74  [1X02_NO_SILK]  57.02,95.89 90 top
JP75  [USB-AB-MICRO-SMD_V03]  52.32,109.09 270 top
JP76  [1X12_NO_SILK]  62.99,79.25 90 top
JP77  [1X12_NO_SILK]  78.23,107.19 270 top
JP78  CORTEX_DEBUGPTH  [2X5-PTH-1.27MM]  70.61,82.65 0 top
JP79  [1X02_NO_SILK]  75.31,95.89 90 top
JP80  [USB-AB-MICRO-SMD_V03]  70.61,109.09 270 top
JP81  [1X12_NO_SILK]  81.28,79.25 90 top
JP82  [1X12_NO_SILK]  96.52,107.19 270 top
JP83  CORTEX_DEBUGPTH  [2X5-PTH-1.27MM]  88.9,82.65 0 top
JP84  [1X02_NO_SILK]  93.6,95.89 90 top
JP85  [USB-AB-MICRO-SMD_V03]  88.9,109.09 270 top
JP86  [1X12_NO_SILK]  99.57,79.25 90 top
JP87  [1X12_NO_SILK]  114.81,107.19 270 top
JP88  CORTEX_DEBUGPTH  [2X5-PTH-1.27MM]  107.19,82.65 0 top
JP89  [1X02_NO_SILK]  111.89,95.89 90 top
JP90  [USB-AB-MICRO-SMD_V03]  107.19,109.09 270 top
L1  FB - 30Ohm  [0603]  18.29,14.22 180 top
L2  FB - 30Ohm  [0603]  36.58,14.22 180 top
L3  FB - 30Ohm  [0603]  54.86,14.22 180 top
L4  FB - 30Ohm  [0603]  73.15,14.22 180 top
L5  FB - 30Ohm  [0603]  91.44,14.22 180 top
L6  FB - 30Ohm  [0603]  109.73,14.22 180 top
L7  FB - 30Ohm  [0603]  18.29,49.78 180 top
L8  FB - 30Ohm  [0603]  36.58,49.78 180 top
L9  FB - 30Ohm  [0603]  54.86,49.78 180 top
L10  FB - 30Ohm  [0603]  73.15,49.78 180 top
L11  FB - 30Ohm  [0603]  91.44,49.78 180 top
L12  FB - 30Ohm  [0603]  109.73,49.78 180 top
L13  FB - 30Ohm  [0603]  18.29,85.34 180 top
L14  FB - 30Ohm  [0603]  36.58,85.34 180 top
L15  FB - 30Ohm  [0603]  54.86,85.34 180 top
L16  FB - 30Ohm  [0603]  73.15,85.34 180 top
L17  FB - 30Ohm  [0603]  91.44,85.34 180 top
L18  FB - 30Ohm  [0603]  109.73,85.34 180 top
LOGO1  SFE_LOGO_FLAME.1_INCH  [SFE_LOGO_FLAME_.1]  17.4,25.78 0 top
LOGO2  OSHW-LOGOS  [OSHW-LOGO-S]  15.75,14.73 0 bottom
LOGO3  SFE_LOGO_NAME_FLAME.1_INCH  [SFE_LOGO_NAME_FLAME_.1]  21.72,20.45 0 bottom
LOGO4  SFE_LOGO_FLAME.1_INCH  [SFE_LOGO_FLAME_.1]  35.69,25.78 0 top
LOGO5  OSHW-LOGOS  [OSHW-LOGO-S]  34.04,14.73 0 bottom
LOGO6  SFE_LOGO_NAME_FLAME.1_INCH  [SFE_LOGO_NAME_FLAME_.1]  40.01,20.45 0 bottom
LOGO7  SFE_LOGO_FLAME.1_INCH  [SFE_LOGO_FLAME_.1]  53.98,25.78 0 top
LOGO8  OSHW-LOGOS  [OSHW-LOGO-S]  52.32,14.73 0 bottom
LOGO9  SFE_LOGO_NAME_FLAME.1_INCH  [SFE_LOGO_NAME_FLAME_.1]  58.29,20.45 0 bottom
LOGO10  SFE_LOGO_FLAME.1_INCH  [SFE_LOGO_FLAME_.1]  72.26,25.78 0 top
LOGO11  OSHW-LOGOS  [OSHW-LOGO-S]  70.61,14.73 0 bottom
LOGO12  SFE_LOGO_NAME_FLAME.1_INCH  [SFE_LOGO_NAME_FLAME_.1]  76.58,20.45 0 bottom
LOGO13  SFE_LOGO_FLAME.1_INCH  [SFE_LOGO_FLAME_.1]  90.55,25.78 0 top
LOGO14  OSHW-LOGOS  [OSHW-LOGO-S]  88.9,14.73 0 bottom
LOGO15  SFE_LOGO_NAME_FLAME.1_INCH  [SFE_LOGO_NAME_FLAME_.1]  94.87,20.45 0 bottom
LOGO16  SFE_LOGO_FLAME.1_INCH  [SFE_LOGO_FLAME_.1]  108.84,25.78 0 top
LOGO17  OSHW-LOGOS  [OSHW-LOGO-S]  107.19,14.73 0 bottom
LOGO18  SFE_LOGO_NAME_FLAME.1_INCH  [SFE_LOGO_NAME_FLAME_.1]  113.16,20.45 0 bottom
LOGO19  SFE_LOGO_FLAME.1_INCH  [SFE_LOGO_FLAME_.1]  17.4,61.34 0 top
LOGO20  OSHW-LOGOS  [OSHW-LOGO-S]  15.75,50.29 0 bottom
LOGO21  SFE_LOGO_NAME_FLAME.1_INCH  [SFE_LOGO_NAME_FLAME_.1]  21.72,56.01 0 bottom
LOGO22  SFE_LOGO_FLAME.1_INCH  [SFE_LOGO_FLAME_.1]  35.69,61.34 0 top
LOGO23  OSHW-LOGOS  [OSHW-LOGO-S]  34.04,50.29 0 bottom
LOGO24  SFE_LOGO_NAME_FLAME.1_INCH  [SFE_LOGO_NAME_FLAME_.1]  40.01,56.01 0 bottom
LOGO25  SFE_LOGO_FLAME.1_INCH  [SFE_LOGO_FLAME_.1]  53.98,61.34 0 top
LOGO26  OSHW-LOGOS  [OSHW-LOGO-S]  52.32,50.29 0 bottom
LOGO27  SFE_LOGO_NAME_FLAME.1_INCH  [SFE_LOGO_NAME_FLAME_.1]  58.29,56.01 0 bottom
LOGO28  SFE_LOGO_FLAME.1_INCH  [SFE_LOGO_FLAME_.1]  72.26,61.34 0 top
LOGO29  OSHW-LOGOS  [OSHW-LOGO-S]  70.61,50.29 0 bottom
LOGO30  SFE_LOGO_NAME_FLAME.1_INCH  [SFE_LOGO_NAME_FLAME_.1]  76.58,56.01 0 bottom
LOGO31  SFE_LOGO_FLAME.1_INCH  [SFE_LOGO_FLAME_.1]  90.55,61.34 0 top
LOGO32  OSHW-LOGOS  [OSHW-LOGO-S]  88.9,50.29 0 bottom
LOGO33  SFE_LOGO_NAME_FLAME.1_INCH  [SFE_LOGO_NAME_FLAME_.1]  94.87,56.01 0 bottom
LOGO34  SFE_LOGO_FLAME.1_INCH  [SFE_LOGO_FLAME_.1]  108.84,61.34 0 top
LOGO35  OSHW-LOGOS  [OSHW-LOGO-S]  107.19,50.29 0 bottom
LOGO36  SFE_LOGO_NAME_FLAME.1_INCH  [SFE_LOGO_NAME_FLAME_.1]  113.16,56.01 0 bottom
LOGO37  SFE_LOGO_FLAME.1_INCH  [SFE_LOGO_FLAME_.1]  17.4,96.9 0 top
LOGO38  OSHW-LOGOS  [OSHW-LOGO-S]  15.75,85.85 0 bottom
LOGO39  SFE_LOGO_NAME_FLAME.1_INCH  [SFE_LOGO_NAME_FLAME_.1]  21.72,91.57 0 bottom
LOGO40  SFE_LOGO_FLAME.1_INCH  [SFE_LOGO_FLAME_.1]  35.69,96.9 0 top
LOGO41  OSHW-LOGOS  [OSHW-LOGO-S]  34.04,85.85 0 bottom
LOGO42  SFE_LOGO_NAME_FLAME.1_INCH  [SFE_LOGO_NAME_FLAME_.1]  40.01,91.57 0 bottom
LOGO43  SFE_LOGO_FLAME.1_INCH  [SFE_LOGO_FLAME_.1]  53.98,96.9 0 top
LOGO44  OSHW-LOGOS  [OSHW-LOGO-S]  52.32,85.85 0 bottom
LOGO45  SFE_LOGO_NAME_FLAME.1_INCH  [SFE_LOGO_NAME_FLAME_.1]  58.29,91.57 0 bottom
LOGO46  SFE_LOGO_FLAME.1_INCH  [SFE_LOGO_FLAME_.1]  72.26,96.9 0 top
LOGO47  OSHW-LOGOS  [OSHW-LOGO-S]  70.61,85.85 0 bottom
LOGO48  SFE_LOGO_NAME_FLAME.1_INCH  [SFE_LOGO_NAME_FLAME_.1]  76.58,91.57 0 bottom
LOGO49  SFE_LOGO_FLAME.1_INCH  [SFE_LOGO_FLAME_.1]  90.55,96.9 0 top
LOGO50  OSHW-LOGOS  [OSHW-LOGO-S]  88.9,85.85 0 bottom
LOGO51  SFE_LOGO_NAME_FLAME.1_INCH  [SFE_LOGO_NAME_FLAME_.1]  94.87,91.57 0 bottom
LOGO52  SFE_LOGO_FLAME.1_INCH  [SFE_LOGO_FLAME_.1]  108.84,96.9 0 top
LOGO53  OSHW-LOGOS  [OSHW-LOGO-S]  107.19,85.85 0 bottom
LOGO54  SFE_LOGO_NAME_FLAME.1_INCH  [SFE_LOGO_NAME_FLAME_.1]  113.16,91.57 0 bottom
Q1  2N7002PW  [SOT323]  20.83,29.72 0 top
Q2  2N7002PW  [SOT323]  39.12,29.72 0 top
Q3  2.5A/30V  [SOT23-3]  18.03,32.26 270 top
Q4  2.5A/30V  [SOT23-3]  36.32,32.26 270 top
Q5  2N7002PW  [SOT323]  57.4,29.72 0 top
Q6  2.5A/30V  [SOT23-3]  54.61,32.26 270 top
Q7  2N7002PW  [SOT323]  75.69,29.72 0 top
Q8  2.5A/30V  [SOT23-3]  72.9,32.26 270 top
Q9  2N7002PW  [SOT323]  93.98,29.72 0 top
Q10  2.5A/30V  [SOT23-3]  91.19,32.26 270 top
Q11  2N7002PW  [SOT323]  112.27,29.72 0 top
Q12  2.5A/30V  [SOT23-3]  109.47,32.26 270 top
Q13  2N7002PW  [SOT323]  20.83,65.28 0 top
Q14  2.5A/30V  [SOT23-3]  18.03,67.82 270 top
Q15  2N7002PW  [SOT323]  39.12,65.28 0 top
Q16  2.5A/30V  [SOT23-3]  36.32,67.82 270 top
Q17  2N7002PW  [SOT323]  57.4,65.28 0 top
Q18  2.5A/30V  [SOT23-3]  54.61,67.82 270 top
Q19  2N7002PW  [SOT323]  75.69,65.28 0 top
Q20  2.5A/30V  [SOT23-3]  72.9,67.82 270 top
Q21  2N7002PW  [SOT323]  93.98,65.28 0 top
Q22  2.5A/30V  [SOT23-3]  91.19,67.82 270 top
Q23  2N7002PW  [SOT323]  112.27,65.28 0 top
Q24  2.5A/30V  [SOT23-3]  109.47,67.82 270 top
Q25  2N7002PW  [SOT323]  20.83,100.84 0 top
Q26  2.5A/30V  [SOT23-3]  18.03,103.38 270 top
Q27  2N7002PW  [SOT323]  39.12,100.84 0 top
Q28  2.5A/30V  [SOT23-3]  36.32,103.38 270 top
Q29  2N7002PW  [SOT323]  57.4,100.84 0 top
Q30  2.5A/30V  [SOT23-3]  54.61,103.38 270 top
Q31  2N7002PW  [SOT323]  75.69,100.84 0 top
Q32  2.5A/30V  [SOT23-3]  72.9,103.38 270 top
Q33  2N7002PW  [SOT323]  93.98,100.84 0 top
Q34  2.5A/30V  [SOT23-3]  91.19,103.38 270 top
Q35  2N7002PW  [SOT323]  112.27,100.84 0 top
Q36  2.5A/30V  [SOT23-3]  109.47,103.38 270 top
R1  10K  [0603-RES]  20.83,13.21 90 top
R2  330  [0603-RES]  8.76,39.12 0 top
R3  330  [0603-RES]  22.73,39.12 180 top
R4  100k  [0603-RES]  13.21,32.26 270 top
R5  330  [0603-RES]  14.48,32.26 90 top
R6  330  [0603-RES]  11.94,8.76 90 top
R7  47K  [0603-RES]  15.75,32.26 270 top
R8  330  [0603-RES]  19.56,8.76 90 top
R9  10K  [0603-RES]  39.12,13.21 90 top
R10  330  [0603-RES]  27.05,39.12 0 top
R11  330  [0603-RES]  41.02,39.12 180 top
R12  100k  [0603-RES]  31.5,32.26 270 top
R13  330  [0603-RES]  32.77,32.26 90 top
R14  47K  [0603-RES]  34.04,32.26 270 top
R15  330  [0603-RES]  30.23,8.76 90 top
R16  330  [0603-RES]  37.85,8.76 90 top
R17  10K  [0603-RES]  57.4,13.21 90 top
R18  330  [0603-RES]  45.34,39.12 0 top
R19  330  [0603-RES]  59.31,39.12 180 top
R20  100k  [0603-RES]  49.78,32.26 270 top
R21  330  [0603-RES]  51.05,32.26 90 top
R22  47K  [0603-RES]  52.32,32.26 270 top
R23  330  [0603-RES]  48.51,8.76 90 top
R24  330  [0603-RES]  56.13,8.76 90 top
R25  10K  [0603-RES]  75.69,13.21 90 top
R26  330  [0603-RES]  63.63,39.12 0 top
R27  330  [0603-RES]  77.6,39.12 180 top
R28  100k  [0603-RES]  68.07,32.26 270 top
R29  330  [0603-RES]  69.34,32.26 90 top
R30  47K  [0603-RES]  70.61,32.26 270 top
R31  330  [0603-RES]  66.8,8.76 90 top
R32  330  [0603-RES]  74.42,8.76 90 top
R33  10K  [0603-RES]  93.98,13.21 90 top
R34  330  [0603-RES]  81.92,39.12 0 top
R35  330  [0603-RES]  95.89,39.12 180 top
R36  100k  [0603-RES]  86.36,32.26 270 top
R37  330  [0603-RES]  87.63,32.26 90 top
R38  47K  [0603-RES]  88.9,32.26 270 top
R39  330  [0603-RES]  85.09,8.76 90 top
R40  330  [0603-RES]  92.71,8.76 90 top
R41  10K  [0603-RES]  112.27,13.21 90 top
R42  330  [0603-RES]  100.2,39.12 0 top
R43  330  [0603-RES]  114.17,39.12 180 top
R44  100k  [0603-RES]  104.65,32.26 270 top
R45  330  [0603-RES]  105.92,32.26 90 top
R46  47K  [0603-RES]  107.19,32.26 270 top
R47  330  [0603-RES]  103.38,8.76 90 top
R48  330  [0603-RES]  111,8.76 90 top
R49  10K  [0603-RES]  20.83,48.77 90 top
R50  330  [0603-RES]  8.76,74.68 0 top
R51  330  [0603-RES]  22.73,74.68 180 top
R52  100k  [0603-RES]  13.21,67.82 270 top
R53  330  [0603-RES]  14.48,67.82 90 top
R54  47K  [0603-RES]  15.75,67.82 270 top
R55  330  [0603-RES]  11.94,44.32 90 top
R56  330  [0603-RES]  19.56,44.32 90 top
R57  10K  [0603-RES]  39.12,48.77 90 top
R58  330  [0603-RES]  27.05,74.68 0 top
R59  330  [0603-RES]  41.02,74.68 180 top
R60  100k  [0603-RES]  31.5,67.82 270 top
R61  330  [0603-RES]  32.77,67.82 90 top
R62  47K  [0603-RES]  34.04,67.82 270 top
R63  330  [0603-RES]  30.23,44.32 90 top
R64  330  [0603-RES]  37.85,44.32 90 top
R65  10K  [0603-RES]  57.4,48.77 90 top
R66  330  [0603-RES]  45.34,74.68 0 top
R67  330  [0603-RES]  59.31,74.68 180 top
R68  100k  [0603-RES]  49.78,67.82 270 top
R69  330  [0603-RES]  51.05,67.82 90 top
R70  47K  [0603-RES]  52.32,67.82 270 top
R71  330  [0603-RES]  48.51,44.32 90 top
R72  330  [0603-RES]  56.13,44.32 90 top
R73  10K  [0603-RES]  75.69,48.77 90 top
R74  330  [0603-RES]  63.63,74.68 0 top
R75  330  [0603-RES]  77.6,74.68 180 top
R76  100k  [0603-RES]  68.07,67.82 270 top
R77  330  [0603-RES]  69.34,67.82 90 top
R78  47K  [0603-RES]  70.61,67.82 270 top
R79  330  [0603-RES]  66.8,44.32 90 top
R80  330  [0603-RES]  74.42,44.32 90 top
R81  10K  [0603-RES]  93.98,48.77 90 top
R82  330  [0603-RES]  81.92,74.68 0 top
R83  330  [0603-RES]  95.89,74.68 180 top
R84  100k  [0603-RES]  86.36,67.82 270 top
R85  330  [0603-RES]  87.63,67.82 90 top
R86  47K  [0603-RES]  88.9,67.82 270 top
R87  330  [0603-RES]  85.09,44.32 90 top
R88  330  [0603-RES]  92.71,44.32 90 top
R89  10K  [0603-RES]  112.27,48.77 90 top
R90  330  [0603-RES]  100.2,74.68 0 top
R91  330  [0603-RES]  114.17,74.68 180 top
R92  100k  [0603-RES]  104.65,67.82 270 top
R93  330  [0603-RES]  105.92,67.82 90 top
R94  47K  [0603-RES]  107.19,67.82 270 top
R95  330  [0603-RES]  103.38,44.32 90 top
R96  330  [0603-RES]  111,44.32 90 top
R97  10K  [0603-RES]  20.83,84.33 90 top
R98  330  [0603-RES]  8.76,110.24 0 top
R99  330  [0603-RES]  22.73,110.24 180 top
R100  100k  [0603-RES]  13.21,103.38 270 top
R101  330  [0603-RES]  14.48,103.38 90 top
R102  47K  [0603-RES]  15.75,103.38 270 top
R103  330  [0603-RES]  11.94,79.88 90 top
R104  330  [0603-RES]  19.56,79.88 90 top
R105  10K  [0603-RES]  39.12,84.33 90 top
R106  330  [0603-RES]  27.05,110.24 0 top
R107  330  [0603-RES]  41.02,110.24 180 top
R108  100k  [0603-RES]  31.5,103.38 270 top
R109  330  [0603-RES]  32.77,103.38 90 top
R110  47K  [0603-RES]  34.04,103.38 270 top
R111  330  [0603-RES]  30.23,79.88 90 top
R112  330  [0603-RES]  37.85,79.88 90 top
R113  10K  [0603-RES]  57.4,84.33 90 top
R114  330  [0603-RES]  45.34,110.24 0 top
R115  330  [0603-RES]  59.31,110.24 180 top
R116  100k  [0603-RES]  49.78,103.38 270 top
R117  330  [0603-RES]  51.05,103.38 90 top
R118  47K  [0603-RES]  52.32,103.38 270 top
R119  330  [0603-RES]  48.51,79.88 90 top
R120  330  [0603-RES]  56.13,79.88 90 top
R121  10K  [0603-RES]  75.69,84.33 90 top
R122  330  [0603-RES]  63.63,110.24 0 top
R123  330  [0603-RES]  77.6,110.24 180 top
R124  100k  [0603-RES]  68.07,103.38 270 top
R125  330  [0603-RES]  69.34,103.38 90 top
R126  47K  [0603-RES]  70.61,103.38 270 top
R127  330  [0603-RES]  66.8,79.88 90 top
R128  330  [0603-RES]  74.42,79.88 90 top
R129  10K  [0603-RES]  93.98,84.33 90 top
R130  330  [0603-RES]  81.92,110.24 0 top
R131  330  [0603-RES]  95.89,110.24 180 top
R132  100k  [0603-RES]  86.36,103.38 270 top
R133  330  [0603-RES]  87.63,103.38 90 top
R134  47K  [0603-RES]  88.9,103.38 270 top
R135  330  [0603-RES]  85.09,79.88 90 top
R136  330  [0603-RES]  92.71,79.88 90 top
R137  10K  [0603-RES]  112.27,84.33 90 top
R138  330  [0603-RES]  100.2,110.24 0 top
R139  330  [0603-RES]  114.17,110.24 180 top
R140  100k  [0603-RES]  104.65,103.38 270 top
R141  330  [0603-RES]  105.92,103.38 90 top
R142  47K  [0603-RES]  107.19,103.38 270 top
R143  330  [0603-RES]  103.38,79.88 90 top
R144  330  [0603-RES]  111,79.88 90 top
S1  RESET  [TACTILE_SWITCH_SMD_4.6X2.8MM]  34.04,8.26 180 top
S2  RESET  [TACTILE_SWITCH_SMD_4.6X2.8MM]  15.75,8.26 180 top
S3  RESET  [TACTILE_SWITCH_SMD_4.6X2.8MM]  52.32,8.26 180 top
S4  RESET  [TACTILE_SWITCH_SMD_4.6X2.8MM]  70.61,8.26 180 top
S5  RESET  [TACTILE_SWITCH_SMD_4.6X2.8MM]  88.9,8.26 180 top
S6  RESET  [TACTILE_SWITCH_SMD_4.6X2.8MM]  107.19,8.26 180 top
S7  RESET  [TACTILE_SWITCH_SMD_4.6X2.8MM]  15.75,43.81 180 top
S8  RESET  [TACTILE_SWITCH_SMD_4.6X2.8MM]  34.04,43.81 180 top
S9  RESET  [TACTILE_SWITCH_SMD_4.6X2.8MM]  52.32,43.81 180 top
S10  RESET  [TACTILE_SWITCH_SMD_4.6X2.8MM]  70.61,43.81 180 top
S11  RESET  [TACTILE_SWITCH_SMD_4.6X2.8MM]  88.9,43.81 180 top
S12  RESET  [TACTILE_SWITCH_SMD_4.6X2.8MM]  107.19,43.81 180 top
S13  RESET  [TACTILE_SWITCH_SMD_4.6X2.8MM]  15.75,79.38 180 top
S14  RESET  [TACTILE_SWITCH_SMD_4.6X2.8MM]  34.04,79.38 180 top
S15  RESET  [TACTILE_SWITCH_SMD_4.6X2.8MM]  52.32,79.38 180 top
S16  RESET  [TACTILE_SWITCH_SMD_4.6X2.8MM]  70.61,79.38 180 top
S17  RESET  [TACTILE_SWITCH_SMD_4.6X2.8MM]  88.9,79.38 180 top
S18  RESET  [TACTILE_SWITCH_SMD_4.6X2.8MM]  107.19,79.38 180 top
SJ1  PWR-LED  [PAD-JUMPER-2-NC_BY_TRACE_NO_SILK]  8.76,38.48 0 bottom
SJ2  PWR-LED  [PAD-JUMPER-2-NC_BY_TRACE_NO_SILK]  27.05,38.48 0 bottom
SJ3  PWR-LED  [PAD-JUMPER-2-NC_BY_TRACE_NO_SILK]  45.34,38.48 0 bottom
SJ4  PWR-LED  [PAD-JUMPER-2-NC_BY_TRACE_NO_SILK]  63.63,38.48 0 bottom
SJ5  PWR-LED  [PAD-JUMPER-2-NC_BY_TRACE_NO_SILK]  81.92,38.48 0 bottom
SJ6  PWR-LED  [PAD-JUMPER-2-NC_BY_TRACE_NO_SILK]  100.2,38.48 0 bottom
SJ7  PWR-LED  [PAD-JUMPER-2-NC_BY_TRACE_NO_SILK]  8.76,74.04 0 bottom
SJ8  PWR-LED  [PAD-JUMPER-2-NC_BY_TRACE_NO_SILK]  27.05,74.04 0 bottom
SJ9  PWR-LED  [PAD-JUMPER-2-NC_BY_TRACE_NO_SILK]  45.34,74.04 0 bottom
SJ10  PWR-LED  [PAD-JUMPER-2-NC_BY_TRACE_NO_SILK]  63.63,74.04 0 bottom
SJ11  PWR-LED  [PAD-JUMPER-2-NC_BY_TRACE_NO_SILK]  81.92,74.04 0 bottom
SJ12  PWR-LED  [PAD-JUMPER-2-NC_BY_TRACE_NO_SILK]  100.2,74.04 0 bottom
SJ13  PWR-LED  [PAD-JUMPER-2-NC_BY_TRACE_NO_SILK]  8.76,109.6 0 bottom
SJ14  PWR-LED  [PAD-JUMPER-2-NC_BY_TRACE_NO_SILK]  27.05,109.6 0 bottom
SJ15  PWR-LED  [PAD-JUMPER-2-NC_BY_TRACE_NO_SILK]  45.34,109.6 0 bottom
SJ16  PWR-LED  [PAD-JUMPER-2-NC_BY_TRACE_NO_SILK]  63.63,109.6 0 bottom
SJ17  PWR-LED  [PAD-JUMPER-2-NC_BY_TRACE_NO_SILK]  81.92,109.6 0 bottom
SJ18  PWR-LED  [PAD-JUMPER-2-NC_BY_TRACE_NO_SILK]  100.2,109.6 0 bottom
U1  ATSAMD21G-A  [TQFP-48]  15.75,20.57 90 top
U2  MIC5219 3.3V  [SOT23-5]  14.48,28.07 180 top
U3  74AHC1G125  [SOT23-5]  10.67,32.26 180 top
U4  ATSAMD21G-A  [TQFP-48]  34.04,20.57 90 top
U5  MIC5219 3.3V  [SOT23-5]  32.77,28.07 180 top
U6  74AHC1G125  [SOT23-5]  28.96,32.26 180 top
U7  ATSAMD21G-A  [TQFP-48]  52.32,20.57 90 top
U8  MIC5219 3.3V  [SOT23-5]  51.05,28.07 180 top
U9  74AHC1G125  [SOT23-5]  47.24,32.26 180 top
U10  ATSAMD21G-A  [TQFP-48]  70.61,20.57 90 top
U11  MIC5219 3.3V  [SOT23-5]  69.34,28.07 180 top
U12  74AHC1G125  [SOT23-5]  65.53,32.26 180 top
U13  ATSAMD21G-A  [TQFP-48]  88.9,20.57 90 top
U14  MIC5219 3.3V  [SOT23-5]  87.63,28.07 180 top
U15  74AHC1G125  [SOT23-5]  83.82,32.26 180 top
U16  ATSAMD21G-A  [TQFP-48]  107.19,20.57 90 top
U17  MIC5219 3.3V  [SOT23-5]  105.92,28.07 180 top
U18  74AHC1G125  [SOT23-5]  102.11,32.26 180 top
U19  ATSAMD21G-A  [TQFP-48]  15.75,56.13 90 top
U20  MIC5219 3.3V  [SOT23-5]  14.48,63.63 180 top
U21  74AHC1G125  [SOT23-5]  10.67,67.82 180 top
U22  ATSAMD21G-A  [TQFP-48]  34.04,56.13 90 top
U23  MIC5219 3.3V  [SOT23-5]  32.77,63.63 180 top
U24  74AHC1G125  [SOT23-5]  28.96,67.82 180 top
U25  ATSAMD21G-A  [TQFP-48]  52.32,56.13 90 top
U26  MIC5219 3.3V  [SOT23-5]  51.05,63.63 180 top
U27  74AHC1G125  [SOT23-5]  47.24,67.82 180 top
U28  ATSAMD21G-A  [TQFP-48]  70.61,56.13 90 top
U29  MIC5219 3.3V  [SOT23-5]  69.34,63.63 180 top
U30  74AHC1G125  [SOT23-5]  65.53,67.82 180 top
U31  ATSAMD21G-A  [TQFP-48]  88.9,56.13 90 top
U32  MIC5219 3.3V  [SOT23-5]  87.63,63.63 180 top
U33  74AHC1G125  [SOT23-5]  83.82,67.82 180 top
U34  ATSAMD21G-A  [TQFP-48]  107.19,56.13 90 top
U35  MIC5219 3.3V  [SOT23-5]  105.92,63.63 180 top
U36  74AHC1G125  [SOT23-5]  102.11,67.82 180 top
U37  ATSAMD21G-A  [TQFP-48]  15.75,91.69 90 top
U38  MIC5219 3.3V  [SOT23-5]  14.48,99.19 180 top
U39  74AHC1G125  [SOT23-5]  10.67,103.38 180 top
U40  ATSAMD21G-A  [TQFP-48]  34.04,91.69 90 top
U41  MIC5219 3.3V  [SOT23-5]  32.77,99.19 180 top
U42  74AHC1G125  [SOT23-5]  28.96,103.38 180 top
U43  ATSAMD21G-A  [TQFP-48]  52.32,91.69 90 top
U44  MIC5219 3.3V  [SOT23-5]  51.05,99.19 180 top
U45  74AHC1G125  [SOT23-5]  47.24,103.38 180 top
U46  ATSAMD21G-A  [TQFP-48]  70.61,91.69 90 top
U47  MIC5219 3.3V  [SOT23-5]  69.34,99.19 180 top
U48  74AHC1G125  [SOT23-5]  65.53,103.38 180 top
U49  ATSAMD21G-A  [TQFP-48]  88.9,91.69 90 top
U50  MIC5219 3.3V  [SOT23-5]  87.63,99.19 180 top
U51  74AHC1G125  [SOT23-5]  83.82,103.38 180 top
U52  ATSAMD21G-A  [TQFP-48]  107.19,91.69 90 top
U53  MIC5219 3.3V  [SOT23-5]  105.92,99.19 180 top
U54  74AHC1G125  [SOT23-5]  102.11,103.38 180 top
Y1  32.768kHz  [CRYSTAL-SMD-3.2X1.5MM]  11.81,14.22 180 top
Y2  32.768kHz  [CRYSTAL-SMD-3.2X1.5MM]  30.1,14.22 180 top
Y3  32.768kHz  [CRYSTAL-SMD-3.2X1.5MM]  48.39,14.22 180 top
Y4  32.768kHz  [CRYSTAL-SMD-3.2X1.5MM]  66.67,14.22 180 top
Y5  32.768kHz  [CRYSTAL-SMD-3.2X1.5MM]  84.96,14.22 180 top
Y6  32.768kHz  [CRYSTAL-SMD-3.2X1.5MM]  103.25,14.22 180 top
Y7  32.768kHz  [CRYSTAL-SMD-3.2X1.5MM]  11.81,49.78 180 top
Y8  32.768kHz  [CRYSTAL-SMD-3.2X1.5MM]  30.1,49.78 180 top
Y9  32.768kHz  [CRYSTAL-SMD-3.2X1.5MM]  48.39,49.78 180 top
Y10  32.768kHz  [CRYSTAL-SMD-3.2X1.5MM]  66.67,49.78 180 top
Y11  32.768kHz  [CRYSTAL-SMD-3.2X1.5MM]  84.96,49.78 180 top
Y12  32.768kHz  [CRYSTAL-SMD-3.2X1.5MM]  103.25,49.78 180 top
Y13  32.768kHz  [CRYSTAL-SMD-3.2X1.5MM]  11.81,85.34 180 top
Y14  32.768kHz  [CRYSTAL-SMD-3.2X1.5MM]  30.1,85.34 180 top
Y15  32.768kHz  [CRYSTAL-SMD-3.2X1.5MM]  48.39,85.34 180 top
Y16  32.768kHz  [CRYSTAL-SMD-3.2X1.5MM]  66.67,85.34 180 top
Y17  32.768kHz  [CRYSTAL-SMD-3.2X1.5MM]  84.96,85.34 180 top
Y18  32.768kHz  [CRYSTAL-SMD-3.2X1.5MM]  103.25,85.34 180 top

## Library data of the parts
C1-C4 C9-C12 C17-C20 C25-C28 C33-C36 C41-C44 C49-C52 C57-C60 C65-C68 C73-C76 C81-C84 C89-C92 C97-C100 C105-C108 C113-C116 C121-C124 C129-C132 C137-C140 = SparkFun-Capacitors; PROD_ID: CAP-12416
C5 C6 C13 C14 C21 C22 C29 C30 C37 C38 C45 C46 C53 C54 C61 C62 C69 C70 C77 C78 C85 C86 C93 C94 C101 C102 C109 C110 C117 C118 C125 C126 C133 C134 C141 C142 = samd21-temp; PROD_ID: CAP-13063
C7 C15 C23 C31 C39 C47 C55 C63 C71 C79 C87 C95 C103 C111 C119 C127 C135 C143 = SparkFun-Capacitors; PROD_ID: CAP-11625
C8 C16 C24 C32 C40 C48 C56 C64 C72 C80 C88 C96 C104 C112 C120 C128 C136 C144 = SparkFun-Capacitors; PROD_ID: CAP-07888
D1 D7 D11 D15 D19 D23 D27 D31 D35 D39 D43 D47 D51 D55 D59 D63 D67 D71 = SparkFun-LED; PROD_ID: DIO-00821
D2 D5 D9 D13 D17 D21 D25 D29 D33 D37 D41 D45 D49 D53 D57 D61 D65 D69 = SparkFun-LED; PROD_ID: DIO-00819
D3 D6 D10 D14 D18 D22 D26 D30 D34 D38 D42 D46 D50 D54 D58 D62 D66 D70 = SparkFun-LED; PROD_ID: DIO-08575
D4 D8 D12 D16 D20 D24 D28 D32 D36 D40 D44 D48 D52 D56 D60 D64 D68 D72 = SparkFun-LED; PROD_ID: DIO-09003
E$1 = SparkFun-Retired
E$3 E$4 FID1-FID36 LOGO1-LOGO54 = SparkFun-Aesthetics
F1-F18 = SparkFun-PowerIC; PROD_ID: RES-11150
JP1 JP2 JP4 JP6 JP7 JP9 JP11 JP12 JP14 JP16 JP17 JP19 JP21 JP22 JP24 JP26 JP27 JP29 JP31 JP32 JP34 JP36 JP37 JP39 JP41 JP42 JP44 JP46 JP47 JP49 JP51 JP52 JP54 JP56 JP57 JP59 JP61 JP62 JP64 JP66 JP67 JP69 JP71 JP72 JP74 JP76 JP77 JP79 JP81 JP82 JP84 JP86 JP87 JP89 = SparkFun-Connectors
JP3 JP10 JP15 JP20 JP25 JP30 JP35 JP40 JP45 JP50 JP55 JP60 JP65 JP70 JP75 JP80 JP85 JP90 = SparkFun-Connectors; PROD_ID: CONN-11794
JP5 JP8 JP13 JP18 JP23 JP28 JP33 JP38 JP43 JP48 JP53 JP58 JP63 JP68 JP73 JP78 JP83 JP88 = samd21-temp
L1-L18 = SparkFun-Passives; PROD_ID: RES-07859
Q1 Q2 Q5 Q7 Q9 Q11 Q13 Q15 Q17 Q19 Q21 Q23 Q25 Q27 Q29 Q31 Q33 Q35 = SparkFun-DiscreteSemi; PROD_ID: TRANS-11151
Q3 Q4 Q6 Q8 Q10 Q12 Q14 Q16 Q18 Q20 Q22 Q24 Q26 Q28 Q30 Q32 Q34 Q36 = SparkFun-DiscreteSemi; PROD_ID: TRANS-11308
R1 R9 R17 R25 R33 R41 R49 R57 R65 R73 R81 R89 R97 R105 R113 R121 R129 R137 = SparkFun-Resistors; PROD_ID: RES-00824
R2 R3 R5 R6 R8 R10 R11 R13 R15 R16 R18 R19 R21 R23 R24 R26 R27 R29 R31 R32 R34 R35 R37 R39 R40 R42 R43 R45 R47 R48 R50 R51 R53 R55 R56 R58 R59 R61 R63 R64 R66 R67 R69 R71 R72 R74 R75 R77 R79 R80 R82 R83 R85 R87 R88 R90 R91 R93 R95 R96 R98 R99 R101 R103 R104 R106 R107 R109 R111 R112 R114 R115 R117 R119 R120 R122 R123 R125 R127 R128 R130 R131 R133 R135 R136 R138 R139 R141 R143 R144 = SparkFun-Resistors; PROD_ID: RES-00818
R4 R12 R20 R28 R36 R44 R52 R60 R68 R76 R84 R92 R100 R108 R116 R124 R132 R140 = SparkFun-Resistors; PROD_ID: RES-07828
R7 R14 R22 R30 R38 R46 R54 R62 R70 R78 R86 R94 R102 R110 R118 R126 R134 R142 = SparkFun-Resistors; PROD_ID: RES-07871
S1-S18 = samd21-temp; PROD_ID: SWCH-13065
SJ1-SJ18 = SparkFun-Passives
U1 U4 U7 U10 U13 U16 U19 U22 U25 U28 U31 U34 U37 U40 U43 U46 U49 U52 = samd21-temp; PROD_ID: IC-13064
U2 U5 U8 U11 U14 U17 U20 U23 U26 U29 U32 U35 U38 U41 U44 U47 U50 U53 = SparkFun-PowerIC; PROD_ID: VREG-09872
U3 U6 U9 U12 U15 U18 U21 U24 U27 U30 U33 U36 U39 U42 U45 U48 U51 U54 = SparkFun-DigitalIC; PROD_ID: IC-11920
Y1-Y18 = samd21-temp; PROD_ID: XTAL-13062